# Altium PCB usb-can_pcb.PcbDoc
Units mm, origin at the board's own origin, x right, y up, seen from the top; angles counter-clockwise.
Board outline 20 x 50 mm, 2 copper layers (Top Layer, Bottom Layer); 26 components, 34 nets, 157 pads, 28 vias.
Unrouted connection lines stored in the file: 1.
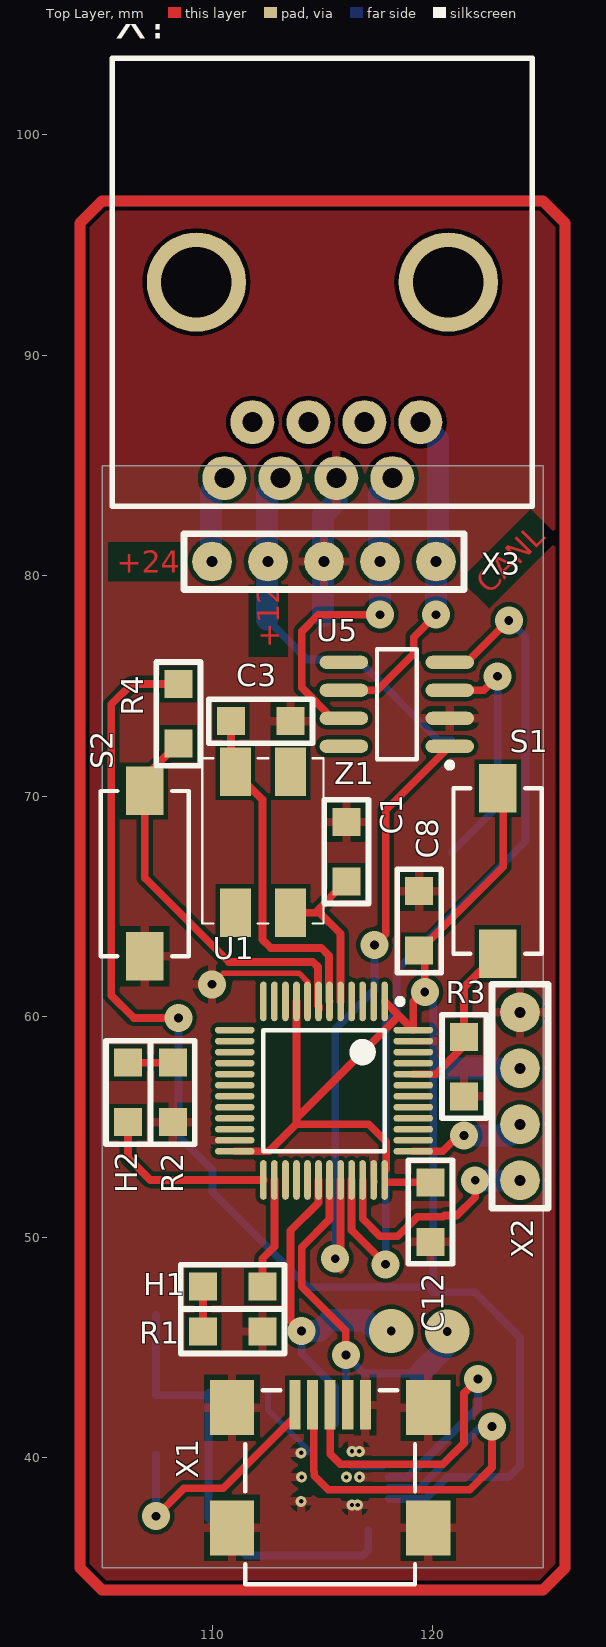
[diagram p0: Top Layer view]
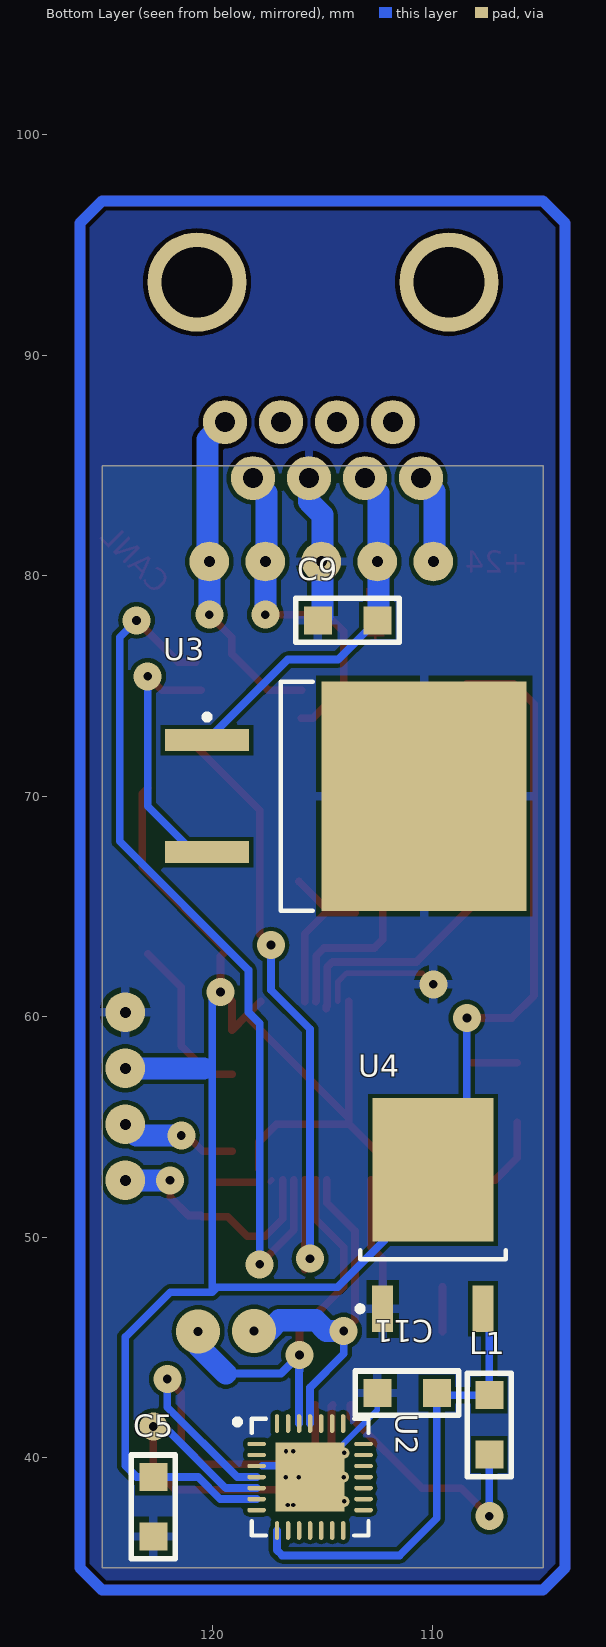
[diagram p1: Bottom Layer view, seen from below]
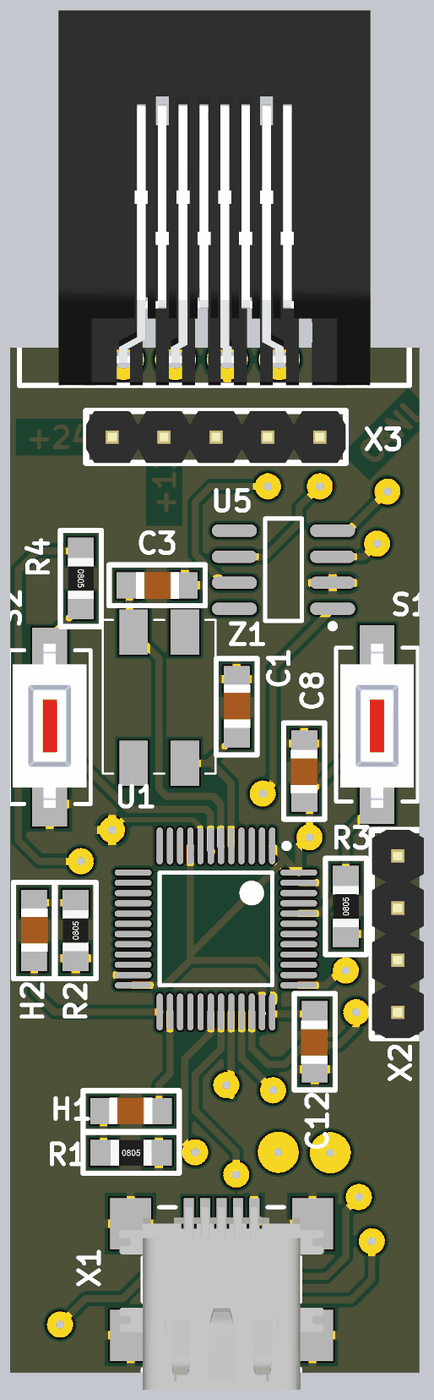
[diagram p2: 3D render of the assembled board from above, using the file's embedded part models]

## Layer stack, top to bottom
Top Solder: solder mask 0.0102, Solder Resist, Dk 3.5
Top Layer: signal copper 0.0356
Dielectric 1: dielectric 0.32, FR-4, Dk 4.8
Bottom Layer: signal copper 0.0356
Bottom Solder: solder mask 0.0102, Solder Resist, Dk 3.5

## Board outline
105,35 105,85 125,85 125,35

## Design rules (kind name [scope] priority, off if disabled: settings)
Clearance Poly_Clearance [All vs InPoly] p1: gap=0.19
Clearance Clearance_1 [All] p2: gap=0.15
PolygonConnect [All] p1: connectstyle=Relief reliefconductorwidth=0.4 reliefentries=4 polygonreliefangle="90 Angle" airgapwidth=0.254
RoutingVias [All] p1: holewidth=0.711 width=1.27 viastyle="Through Hole" minholewidth=0.711 minwidth=1.27 maxholewidth=0.711 maxwidth=1.27
SolderMaskExpansion [All] p1: expansion=0.102
Width [All] p1: maxlimit=1.5 minlimit=0.254 preferedwidth=0.254
30 further rules are at their usual default settings.

## Components (designator, comment, footprint, x,y, rotation, side; value= is the part's Value field where it differs from the comment)
C1 "Condensator" C0805 116.078,66.134 r90 top
C3 "Condensator" C0805 110.838,73.406 r0 top
C5 "Condensator" C0805 122.682,36.416 r90 bottom
C8 "Condensator" C0805 119.38,65.692 r270 top
C9 "Condensator" C0805 112.522,77.978 r0 bottom
C11 "Condensator" C0805 109.822,42.926 r0 bottom
C12 "Condensator" C0805 119.888,52.484 r270 top
H1 "LED_SMD" C0805 112.268,47.752 r180 top
H2 "LED_SMD" C0805 106.172,55.212 r90 top
L1 "Inductance" L0805 107.442,40.132 r90 bottom
R1 "Resistor" R0805 109.568,45.72 r0 top
R2 "Resistor" R0805 108.204,55.212 r90 top
R3 "Resistor" R0805 121.412,56.388 r90 top
R4 "Resistor" R0805 108.458,75.09 r270 top
S1 "Tact_switch" Tact_switch_smd 122.936,70.358 r270 top
S2 "Tact_switch" Tact_switch_smd 106.934,62.738 r90 top
U1 "STM32F103C8T6" LQFP48_N 115.062,56.642 r270 top
U2 "CP2102-GM" SLAB-QFN-28-3125x3125TP_N 115.57,39.116 r180 bottom
U3 "L7805ABD2T-TR" TO-263_N 113.946,70 r180 bottom
U4 "LD1117ADT12TR" TO-252_N 110,51 r90 bottom
U5 "MCP2551-I/SN" SOIC-SN8_N 118.364,74.168 r180 top
X1 "miniUSB" miniUSB 115.338,36.612 r0 top
X2 "Pins 4x2.54" "Pins 4x2.54" 123.952,52.578 r90 top
X3 "Pins 5x2.54" "Pins 5x2.54" 120.142,80.645 r180 top
X? "RJ45" RJ45 119.431,86.97 r180 top
Z1 "12 MHz" "kx 13 12MHz" 111.038,64.72 r90 top

## Footprints (in the part's own frame and the unit in brackets; to place one, negate y for a bottom-side part, rotate by r counter-clockwise, add the part's x,y. Pads: shape width x height; smd on the part's side, far side on the other; paste and mask are expansions set on the pad)
C0805 [mm]
  rect 1.27x1.27 smd: 1(0,0) 2(2.7,0)
  silkscreen extent -1,-1 3.7,1, body extent 0.32,-0.66 2.42,0.64, height 0.51
"kx 13 12MHz" [mm]
  rect 2.2x1.4 smd: 1(0,-2.5) 2(6.4,-2.5) 3(6.4,0) 4(0,0)
  silkscreen extent -0.5,-4 7,1.5
L0805 [mm]
  rect 1.27x1.27 smd: 1(0,0) 2(2.7,0)
  silkscreen extent -1,-1 3.7,1
LQFP48_N [mm] "Thin QFP, 48-Leads, Body 7x7mm, Pitch 0.5mm, IPC Medium Density"
  oval 1.8x0.3 smd: 1(-4.05,2.75) 2(-4.05,2.25) 3(-4.05,1.75) 4(-4.05,1.25) 5(-4.05,0.75) 6(-4.05,0.25) 7(-4.05,-0.25) 8(-4.05,-0.75) 9(-4.05,-1.25) 10(-4.05,-1.75) 11(-4.05,-2.25) 12(-4.05,-2.75) 25(4.05,-2.75) 26(4.05,-2.25) 27(4.05,-1.75) 28(4.05,-1.25) 29(4.05,-0.75) 30(4.05,-0.25) 31(4.05,0.25) 32(4.05,0.75) 33(4.05,1.25) 34(4.05,1.75) 35(4.05,2.25) 36(4.05,2.75)
  oval 0.3x1.8 smd: 13(-2.75,-4.05) 14(-2.25,-4.05) 15(-1.75,-4.05) 16(-1.25,-4.05) 17(-0.75,-4.05) 18(-0.25,-4.05) 19(0.25,-4.05) 20(0.75,-4.05) 21(1.25,-4.05) 22(1.75,-4.05) 23(2.25,-4.05) 24(2.75,-4.05) 37(2.75,4.05) 38(2.25,4.05) 39(1.75,4.05) 40(1.25,4.05) 41(0.75,4.05) 42(0.25,4.05) 43(-0.25,4.05) 44(-0.75,4.05) 45(-1.25,4.05) 46(-1.75,4.05) 47(-2.25,4.05) 48(-2.75,4.05)
  silkscreen extent -4.17,-2.75 2.75,3.58, body extent -3.5,-3.5 3.5,3.5, height 1.6
miniUSB [mm]
  rect 0.5x2.25 smd: 1(-1.6,5.775) 2(-0.8,5.775) 3(0,5.775) 4(0.8,5.775) 5(1.6,5.775)
  rect 2x2.5 smd: 6(-4.45,5.65) 7(4.45,5.65) 8(-4.45,0.2) 9(4.45,0.2)
  rect 0x0 smd: ""(-2.2,3.1) ""(2.2,3.1)
  silkscreen extent -3.85,-2.35 3.85,6.45, body extent -5,-2.45 5,6.45, height 3.95
"Pins 4x2.54" [mm]
  round 1.8 hole 0.5: 1(0,0) 2(2.54,0) 3(5.08,0) 4(7.62,0)
  silkscreen extent -1.27,-1.27 8.89,1.27, body extent -1.27,-1.27 8.89,1.27, height 8.81
"Pins 5x2.54" [mm]
  round 1.8 hole 0.5: 1(0,0) 2(2.54,0) 3(5.08,0) 4(7.62,0) 5(10.16,0)
  silkscreen extent -1.27,-1.27 11.43,1.27, body extent -1.27,-1.27 11.43,1.27, height 8.81
R0805 [mm]
  rect 1.27x1.27 smd: 1(0,0) 2(2.7,0)
  silkscreen extent -1,-1 3.7,1, body extent 0.35,-0.62 2.35,0.63, height 0.61
RJ45 [mm]
  round 2 hole 0.9: 1(0,0) 2(1.27,2.54) 3(2.54,0) 4(3.81,2.54) 5(5.08,0) 6(6.35,2.54) 7(7.62,0) 8(8.89,2.54)
  round 4.5 hole 3.21: 9(-1.27,-6.35) 10(10.16,-6.35)
  silkscreen extent -5.08,-16.51 13.97,3.81, body extent -3.18,-14.48 12.07,3.81, height 12.7
SLAB-QFN-28-3125x3125TP_N [mm] "QFN, 28-Leads, Body 5x5mm, Pitch 0.5mm, Thermal Pad 3.13x3.13mm, IPC Medium Density"
  oval 0.85x0.2 smd: 1(-2.425,1.5) 2(-2.425,1) 3(-2.425,0.5) 4(-2.425,0) 5(-2.425,-0.5) 6(-2.425,-1) 7(-2.425,-1.5) 15(2.425,-1.5) 16(2.425,-1) 17(2.425,-0.5) 18(2.425,0) 19(2.425,0.5) 20(2.425,1) 21(2.425,1.5)
  oval 0.2x0.85 smd: 8(-1.5,-2.425) 9(-1,-2.425) 10(-0.5,-2.425) 11(0,-2.425) 12(0.5,-2.425) 13(1,-2.425) 14(1.5,-2.425) 22(1.5,2.425) 23(1,2.425) 24(0.5,2.425) 25(0,2.425) 26(-0.5,2.425) 27(-1,2.425) 28(-1.5,2.425)
  rect 3.13x3.13 smd: 29(0,0)
  silkscreen extent -3.43,-2.65 2.65,2.65, body extent -2.5,-2.5 2.5,2.5, height 1
SOIC-SN8_N [mm] "SOIC, 8-Leads, Body 4.9x3.8mm, Pitch 1.27mm, IPC Medium Density"
  oval 2.2x0.6 smd: 1(-2.4,1.905) 2(-2.4,0.635) 3(-2.4,-0.635) 4(-2.4,-1.905) 5(2.4,-1.905) 6(2.4,-0.635) 7(2.4,0.635) 8(2.4,1.905)
  silkscreen extent -2.53,-2.5 0.9,2.88, body extent -2,-2.5 2,2.5, height 1.75
Tact_switch_smd [mm]
  rect 2.2x1.7 smd: 1(0,0) 2(7.5,0)
  silkscreen extent 0,-2 7.5,2, body extent -0.19,-1.8 7.81,1.8, height 2.51
TO-252_N [mm] "D-PAK, 4-Leads, Body 6.1x6.5mm, Pitch 2.28mm, Lead Span 9.7mm, IPC Medium Density"
  rect 2.1x0.95 smd: 1(-4.25,2.28) 3(-4.25,-2.28)
  rect 6.5x5.5 smd: 4(2.05,0)
  silkscreen extent -4.37,-3.3 -1.6,3.43, body extent -2,-3.3 4.2,3.3, height 2.4
TO-263_N [mm] "D2-PAK, 4-Leads, Body 9.2x10.2mm, Pitch 2.54mm, Lead Span 15.4mm, IPC Medium Density"
  rect 3.8x1 smd: 1(-6.3,2.54) 3(-6.3,-2.54)
  rect 9.3x10.4 smd: 4(3.55,0)
  silkscreen extent -6.43,-5.2 -1.5,5.2, body extent -2.95,-5.2 6.4,5.2, height 4.6

## Part data
U1: "STM32 ARM-based 32-bit MCU with 64 Kbytes Flash, 48-pin LQFP, Industrial Temperature"
U2: "Single-Chip USB to UART Bridge, 1024 Bytes EEPROM, -40 to 85 degC, 28-pin QFN, Tube"
U3: "Positive Voltage Regulator, 3-Pin D2PAK, Tape and Reel"
U4: "1A, Low Drop Positive Voltage Regulator, 1.2V, 3-Pin DPAK, Tape and Reel"
U5: "High-Speed CAN Transceiver, 8-Pin SOIC, Industrial Temperature"
Z1: library part "KX 13 Geyer"

## Via types
v1: diameter 1.27, hole 0.4, Top Layer to Bottom Layer, 17 vias
v2: diameter 0.5, hole 0.2, Top Layer to Bottom Layer, 9 vias
v3: diameter 2, hole 0.4, Top Layer to Bottom Layer, 2 vias

## Nets (pads, with @x,y where several pads share a name; then routed paths per layer and width w, separated by ;. In a path a pad name is that pad's centre, name@x,y a point inside that pad or via, vN(x,y) a via of type N, cw(c..) or ccw(c..) an arc to the next point about the centre after c; other vN are vias at no path point)
+3.3V: C5.2 C8.2 C12.1 R4.1 S1.1 U1.1 U1.9 U1.24 U1.36 U1.48 U2.6 U4.4 X2.3 | length 113.5
  Top Layer w0.35: v1(108.458,59.944) 106.426,59.944 105.41,60.96 105.41,74.168 106.332,75.09 R4.1 ; U1.24 112.566,53.892 113.812,55.138 ; U1.9 113.812,55.392 ; U1.1 118.462,60.042 ; U1.36@117.887,53.086 117.887,54.325 117.094,55.118 113.832,55.118 113.812,55.138 ; U1.36@117.92,52.484 C12.1 ; S1.1 123.19,70.104 123.19,66.802 C8.2 119.634,62.738 119.634,61.214 119.112,60.692 U1.48 118.462,60.042 ; 113.812,55.138 113.812,55.392 ; 113.812,55.392 118.462,60.042
  Bottom Layer w0.35: v1(108.458,59.944) 108.458,54.592 U4.4 110,52.052 114.325,47.727 119.786,47.727 120.015,47.498 ; U2.6 119.65,38.116 120.65,39.116 C5.2 123.444,39.116 123.952,39.624 123.952,45.466 121.92,47.498 120.015,47.498 ; v1(119.634,61.112) 120.015,60.731 120.015,57.277 ; 120.396,57.658 120.015,57.277 ; 120.015,47.498 120.015,57.277
  Bottom Layer w1: 120.396,57.658 X2.3
+5V: U3.3 U5.3 | length 11.5
  Top Layer w0.35: U5.3@120.51,74.803 U5.3 122.301,74.803 v1(122.936,75.438)
  Bottom Layer w0.35: U3.3@120.85,67.46 122.936,69.546 v1(122.936,75.438)
+12V: X3.5 X?.8 | length 3.9
  Bottom Layer w1: X3.5@109.936,80.818 109.936,83.825 X?.8
-12V: C1.2 C3.2 C5.1 C8.1 C9.2 C11.2 C12.2 R1.2 R2.1 R3.1 S2.1 U1.8 U1.23 U1.35 U1.47 U2.3 U2.29 U3.4 U4.1 U5.2 X1.5 X1.6 X1.7 X1.8 X1.9 X2.4 X3.3 X?.4 | length 16.8
  Top Layer w0.254: 110.49,61.976 113.919,61.976 114.312,61.583 U1.8 ; U1.35 U1.35@117.385,52.519
  Bottom Layer w0.254: C11.2 112.522,42.164 114.47,40.216 v2(114.027,40.216)
  Bottom Layer w0.35: U2.29@116.357,39.624 U2.3@117.729,39.624
  Bottom Layer w1: C9.2@115.016,78.184 115.016,82.758 115.621,83.363 X?.4
  other v1: 109.982,61.468
  other v2: 116.332,37.846 116.586,37.846 114.027,38.016 114.046,39.116 116.078,39.116 116.67,39.116 116.332,40.284 116.662,40.284
BATT_KEY: U1.12
BOOT: R3.2 S1.2 U1.44 | length 7.6
  Top Layer w0.35: U1.44 120.13,57.392 121.412,58.674 R3.2 121.412,61.334 S1.2
CAN_RX: U1.32 U5.1 | length 30.1
  Top Layer w0.35: v1(115.57,49.022) 115.57,48.768 115.812,48.526 U1.32 ; v1(117.348,63.246) 117.856,63.754 117.856,69.355 U5.1
  Bottom Layer w0.35: v1(115.57,49.022) 115.57,59.436 117.348,61.214 v1(117.348,63.246)
CAN_TX: U1.33 U5.4 | length 40.1
  Top Layer w0.35: U1.33 116.312,50.312 v1(117.856,48.768) ; U5.4 121.539,76.073 v1(123.444,77.978)
  Bottom Layer w0.35: v1(117.856,48.768) 117.856,59.69 118.364,60.198 118.364,62.114 124.206,67.956 124.206,77.216 v1(123.444,77.978)
CANH: U5.7 X3.2 X?.2 | length 14.4
  Top Layer w0.35: U5.7 115.443,73.533 114.046,74.93 114.046,77.47 114.808,78.232 v1(117.602,78.232)
  Bottom Layer w0.35: X3.2 X3.2@117.602,80.772
  Bottom Layer w1: X3.2@117.556,80.818 X?.2@117.556,83.762 ; v1(117.602,78.232) X3.2
CANL: U5.6 X3.1 X?.1 | length 15.1
  Top Layer w0.35: U5.6 117.475,74.803 119.126,76.454 119.126,77.216 v1(120.142,78.232)
  Bottom Layer w0.35: X3.1 X3.1@120.142,80.772
  Bottom Layer w1: X?.1 120.223,86.177 X3.1@120.223,80.818 ; v1(120.142,78.232) X3.1
COM: C9.1 U3.1 X3.4 X?.6 | length 16.4
  Bottom Layer w0.254: C9.1@112.476,78.024 C9.1
  Bottom Layer w0.35: C9.1 114.3,76.2 116.586,76.2 U3.1 U3.1@120.85,72.54
  Bottom Layer w1: C9.1@112.476,78.024 X?.6@112.476,83.762
MULTIP_A: U1.15
MULTIP_B: U1.14
MULTP_EN: U1.13
NetC1_1: C1.1 U1.5 Z1.1 | length 7.7
  Top Layer w0.35: Z1.1 114.664,64.72 ; U1.5 115.812,63.766 114.858,64.72 114.664,64.72 ; C1.1 114.664,64.72
NetC3_1: C3.1 U1.6 Z1.3 | length 15.6
  Top Layer w0.35: C3.1 110.838,71.32 Z1.3 ; Z1.3@111.252,70.866 112.268,69.85 112.268,63.5 112.649,63.119 114.935,63.119 115.287,62.767 115.287,60.717 U1.6
NetH1_1: H1.1 U1.26 | length 5.1
  Top Layer w0.35: H1.1 112.268,49.022 112.812,49.566 U1.26
NetH1_2: H1.2 R1.1 | length 2
  Top Layer w0.35: R1.1 H1.2
NetH2_1: H2.1 U1.25 | length 8.2
  Top Layer w0.35: H2.1 106.172,53.594 107.174,52.592 U1.25
NetH2_2: H2.2 R2.2 | length 2
  Top Layer w0.35: H2.2 R2.2
NetL1_1: L1.1 X1.1 | length 11.6
  Top Layer w0.35: v1(107.442,37.338) 108.712,38.608 110.49,38.608 113.738,41.856 X1.1
  Bottom Layer w0.35: v1@107.188,37.338 107.442,37.592 L1.1
NetU2_4: U2.4 X1.3 | length 18.7
  Top Layer w0.35: X1.3 115.338,40.161 115.808,39.691 120.452,39.691 121.412,40.651 121.412,42.926 v1(122.047,43.561)
  Bottom Layer w0.35: U2.4 118.872,39.116 122.047,42.291 v1(122.047,43.561)
NetU2_5: U2.5 X1.2 | length 19.7
  Top Layer w0.35: X1.2 114.602,42.323 114.602,39.373 114.621,39.354 114.621,39.176 115.256,38.541 121.675,38.541 122.682,39.548 v1(122.682,41.402)
  Bottom Layer w0.35: U2.5 119.388,38.616 122.174,41.402 v1(122.682,41.402)
RST: R4.2 S2.2 U1.7 | length 19.4
  Top Layer w0.35: R4.2 S2.2@106.62,70.552 ; U1.7@114.837,60.363 114.837,60.46 114.787,60.51 114.787,62.251 114.554,62.484 110.744,62.484 106.934,66.294 S2.2 S2.2@106.62,70.552 ; S2.2@106.62,70.552 106.426,70.746 106.426,70.358 S2.2@106.62,70.552
SPI_ADC1_CS: U1.42
SPI_ADC2_CS: U1.43
SPI_CLK: U1.39
SPI_MISO: U1.40
SPI_MOSI: U1.41
SWC: U1.37 X2.2 | length 5.3
  Top Layer w0.35: U1.37 120.44,53.892 v1@121.285,54.737
  Bottom Layer w0.35: X2.2@123.444,54.61 X2.2
  Bottom Layer w1: v1(121.412,54.61) X2.2@123.444,54.61
SWD: U1.34 X2.1 | length 11
  Top Layer w0.35: U1.34 116.812,50.828 117.602,50.038 118.412,50.038 119.301,50.927 120.475,50.927 120.528,50.98 121.084,50.98 121.92,51.816 v1(121.92,52.578) v1@121.92,52.832
  Bottom Layer w1: v1(121.92,52.578) X2.1
UART_RX: U1.31 U2.26 | length 18.6
  Top Layer w0.35: U1.31 115.312,50.804 114.046,49.538 114.046,47.752 116.053,45.745 v1(116.053,44.653)
  Bottom Layer w0.35: U2.26 116.07,43.95 116.053,43.933 v1(116.053,44.653) 116.891,43.815 119.39,43.815
  Bottom Layer w1: 119.39,43.815 120.65,45.075 v3(120.65,45.72)
UART_TX: U1.30 U2.25 | length 16.9
  Top Layer w0.35: v1(114.046,45.745) 113.538,46.228 113.538,50.292 114.812,51.566 U1.30
  Bottom Layer w0.35: v1(114.046,45.745) 114.046,44.704 115.57,43.18 U2.25
  Bottom Layer w1: v1(114.046,45.745) 114.833,45.745 115.316,46.228 116.967,46.228 117.45,45.745 v3(118.11,45.745)
VBUS: C11.1 L1.2 U2.8 U4.3 | length 20.7
  Bottom Layer w0.35: U4.3@107.442,46.472 L1.2 109.728,42.832 C11.1 109.822,37.244 111.506,35.56 116.84,35.56 117.07,35.79 U2.8
pads on no net: U1.2 U1.3 U1.4 U1.10 U1.11 U1.16 U1.17 U1.18 U1.19 U1.20 U1.21 U1.22 U1.27 U1.28 U1.29 U1.38 U1.45 U1.46 U2.1 U2.2 U2.7 U2.9 U2.10 U2.11 U2.12 U2.13 U2.14 U2.15 U2.16 U2.17 U2.18 U2.19 U2.20 U2.21 U2.22 U2.23 U2.24 U2.27 U2.28 U5.5 U5.8 X1. X1.4 X?.3 X?.5 X?.7 X?.9 X?.10 Z1.2 Z1.4
copper on no net: | length 335.3
  Top Layer w0.5: 104,35 104,96 105,97 125,97 126,96 126,35 125,34 105,34 104,35
  Bottom Layer w0.5: 104,35 104,96 105,97 125,97 126,96 126,35 125,34 105,34 104,35

## Polygon pours and split planes (outlines as drawn)
-12V on Top Layer "Top Layer-No Net" (solid, remove dead copper, pour order 0): 104,97 126,97 126,34 104,34
-12V on Bottom Layer "Top Layer-No Net" (solid, remove dead copper, pour order 2): 104,97.028 126,97.028 126,34 104,34

## Other copper
Top Layer:
  text "+24" at 105.664,80.137 h1
  text "CANL" at 122.555,79.121 h1 r45
  text "+12" at 113.03,76.708 h1 r90

## Dimensions
125,97 to 125,34 on Top Overlay
126,35 to 104,35 on Top Overlay